# EAGLE board pinoccio-test-top-left (EAGLE 6.2)
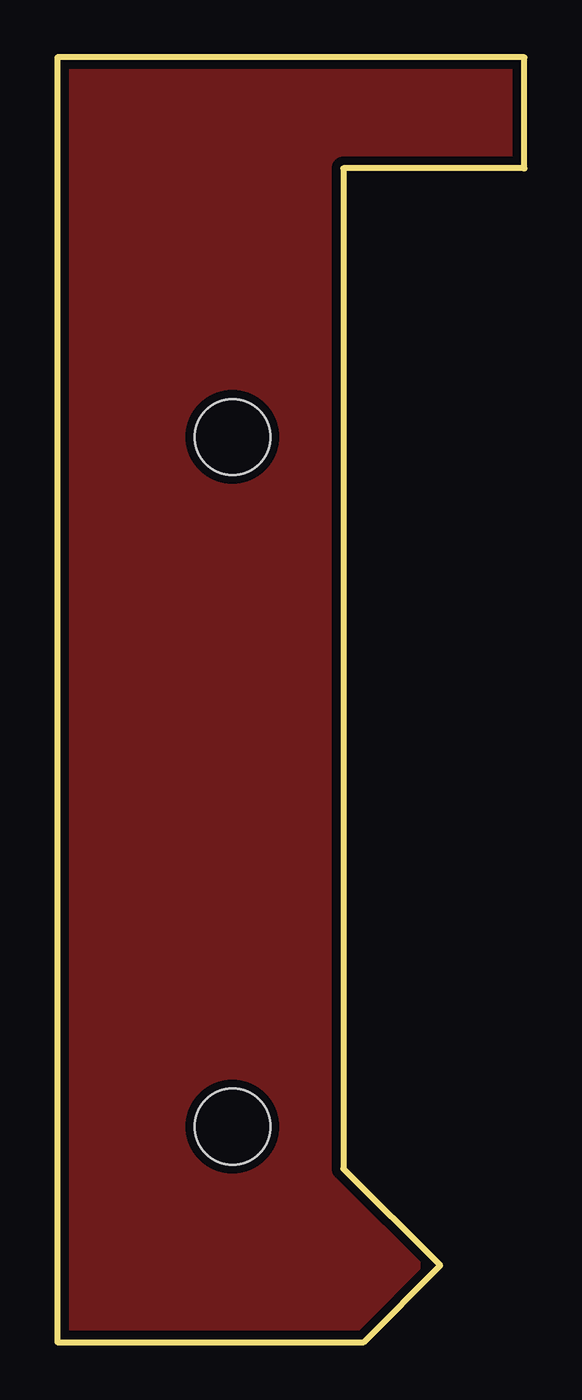
[diagram p0: board, top side]
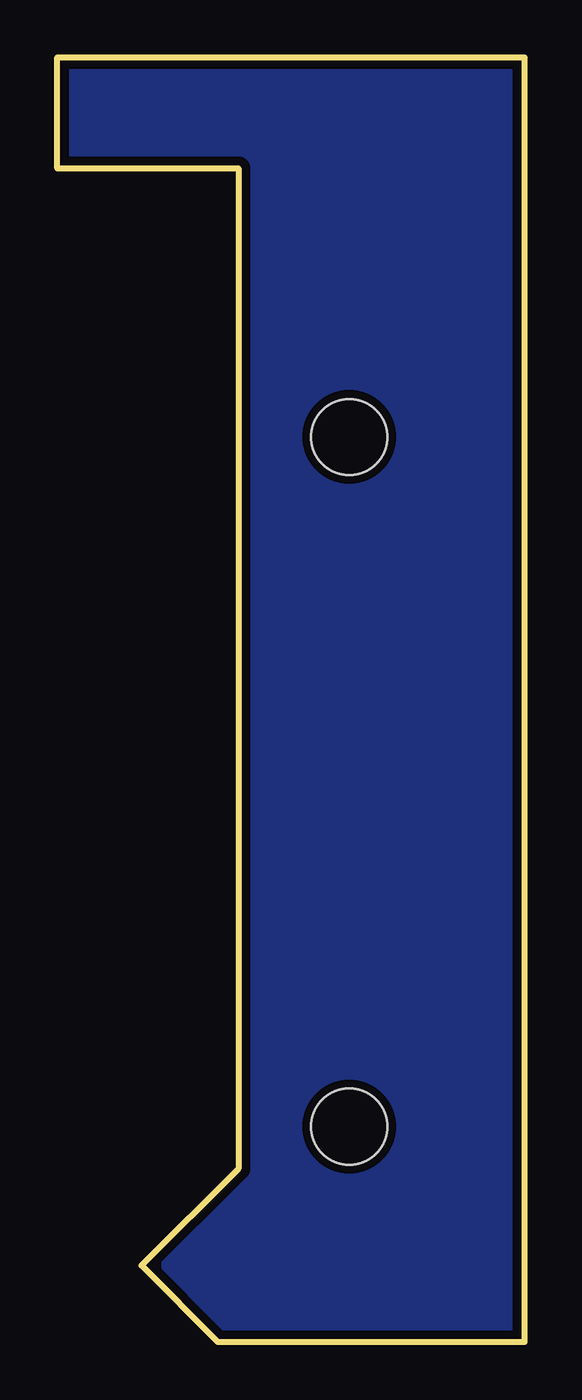
[diagram p1: board, bottom side, seen from below]

Size 20.32 x 55.88 mm. Coordinates in mm from the lower left corner, seen from the top.
Outline: 20.32,51.05 20.32,55.88 0,55.88 0,0 13.34,0 16.66,3.33 12.45,7.54 12.45,51.05 20.3,51.05
Copper layers (1*16): Top 0.0356mm / dielectric 1.5011mm / Bottom 0.0356mm
Design rules: minimum track width 6mil, minimum drill 13mil, track to track 6mil, track to pad 6mil, pad to pad 6mil, via to via 6mil, smd to smd 6mil, copper to edge 15mil, drill to drill 6mil, minimum pad ring 7mil, minimum via ring 7mil, stop-mask expansion 4mil, vias tented up to drill 16mil, thermal gap 10mil
Net classes: 0 Default: width 0.203 mm; 1 VCC: width 0.305 mm; 2 LEDPower: width 0.203 mm; 3 ButtonSignal: width 0.203 mm; 4 RF Antenna: width 0.305 mm; 5 GND: width 0.203 mm

## Footprints (pad centres in the part's own frame; a part is rotated, then mirrored left to right if it is on the bottom)
STAND-OFF = hole 3.302: 0,0

## Placement (x,y rotation side)
JP8  STAND-OFF  [STAND-OFF]  7.62,39.37 0 top
JP9  STAND-OFF  [STAND-OFF]  7.62,9.37 0 top

## Library data of the parts
JP8 JP9 = Pinoccio

## Tracks (layer width: path | path; a pad name or v marks a point on that pad's centre or on a via)
S$2
  pour Bottom: 0.2,55.65 20.09,55.65 20.09,51.23 12.22,51.23 12.22,7.32 16.23,3.3 16.23,3.25 13.26,0.28 0.15,0.28 0.15,55.6
S$3
  pour Top: 0.2,55.7 20.04,55.7 20.04,51.41 12.22,51.41 12.22,7.67 12.22,7.26 16.23,3.25 13.31,0.33 0.2,0.33 0.1,0.33 0.1,55.65

## Text on the board
tDocu: Pinoccio(tm) Scout Test Jig - Top Left v1.0 | Design by: Eric Jennings for Pinoccio | http://pinocc.io | Licensed under CERN OHL v.1.1